# EAGLE board ZeroESPminimalTEST (EAGLE 6.5.0)
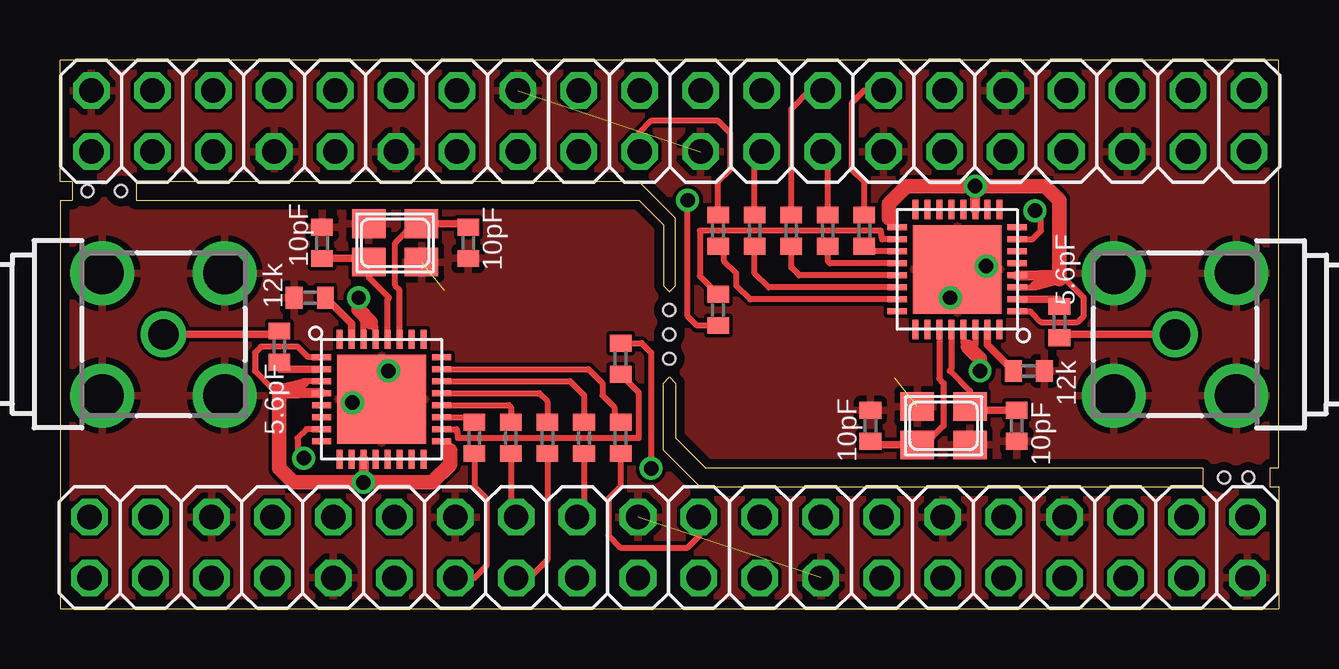
[diagram p0: board, top side]
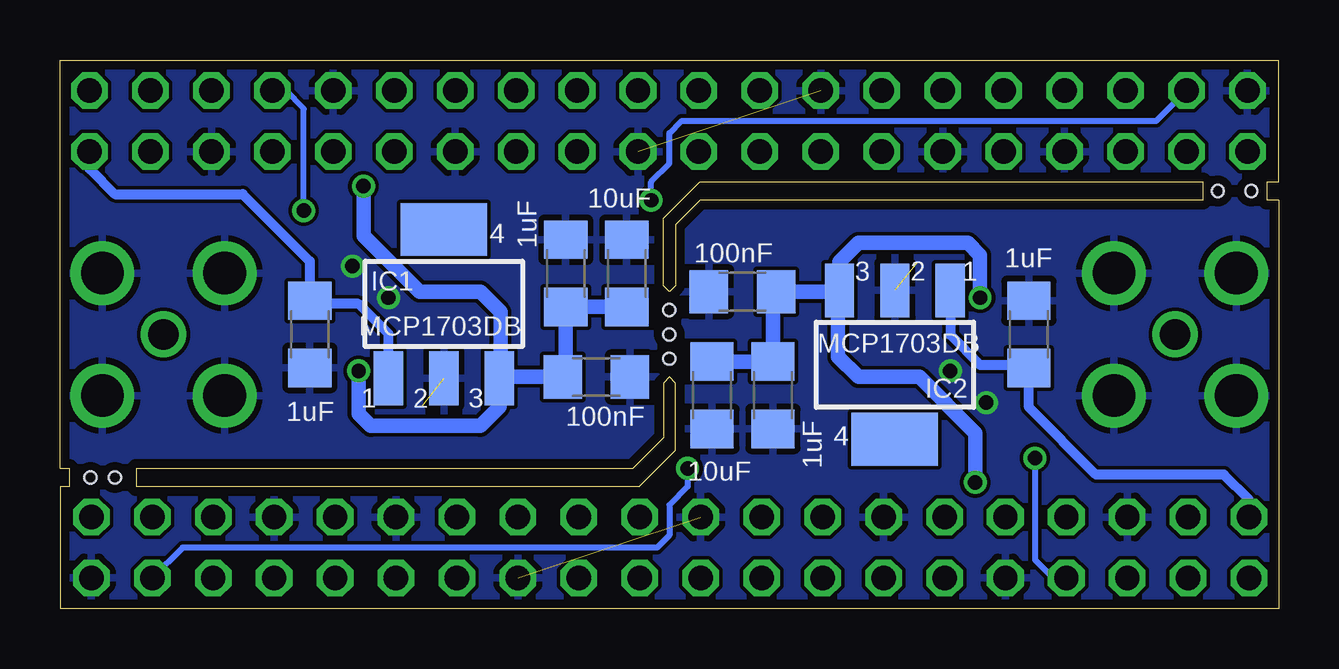
[diagram p1: board, bottom side, seen from below]

Size 50.8 x 22.86 mm. Coordinates in mm from the lower left corner, seen from the top.
Outline: 0,0 50.8,0 50.8,5.08 50.42,5.08 50.42,5.84 50.8,5.84 50.8,22.86 0,22.86 0,17.78 0.51,17.78 0.51,17.02 0,17.02 0,0
Outline: 3.17,17.02 24.13,17.02 25.15,16 25.15,13.46 25.4,13.21 25.65,13.46 25.65,16.26 24.13,17.78 3.17,17.78 3.17,17.02
Outline: 26.67,5.08 47.62,5.08 47.62,5.84 26.92,5.84 25.65,7.11 25.65,9.4 25.4,9.65 25.15,9.4 25.15,6.6 26.67,5.08
Copper layers (1*16): Top 0.0356mm / dielectric 1.5011mm / Bottom 0.0356mm
Design rules "LaenPCBOrder *": minimum track width 6mil, minimum drill 13mil, track to track 6mil, track to pad 6mil, pad to pad 6mil, via to via 6mil, smd to smd 6mil, copper to edge 15mil, drill to drill 6mil, minimum pad ring 7mil, minimum via ring 7mil, stop-mask expansion 3mil, vias tented up to drill 200mil, thermal gap 10mil
Holes 0.5 mm at 25.4,12.45 25.4,11.43 25.4,10.41 1.14,17.4 2.54,17.4 49.53,5.46 48.51,5.46

## Footprints (pad centres in the part's own frame; a part is rotated, then mirrored left to right if it is on the bottom)
C1206 = smd 1.6 x 1.8: 1 -1.4,0; 2 1.4,0
C0402 = smd 0.7 x 0.9: 1 -0.65,0; 2 0.65,0
SOT223 = smd 1.219 x 2.235: 1 -2.311,-3.099; 2 0,-3.099; 3 2.311,-3.099 | smd 3.6 x 2.2: 4 0,3.099
2X20 = drill 1.016 octagon: 1 -24.13,-1.27; 2 -24.13,1.27; 3 -21.59,-1.27; 4 -21.59,1.27; 5 -19.05,-1.27; 6 -19.05,1.27; 7 -16.51,-1.27; 8 -16.51,1.27; 9 -13.97,-1.27; 10 -13.97,1.27; 11 -11.43,-1.27; 12 -11.43,1.27; 13 -8.89,-1.27; 14 -8.89,1.27; 15 -6.35,-1.27; 16 -6.35,1.27; 17 -3.81,-1.27; 18 -3.81,1.27; 19 -1.27,-1.27; 20 -1.27,1.27; 21 1.27,-1.27; 22 1.27,1.27; 23 3.81,-1.27; 24 3.81,1.27; 25 6.35,-1.27; 26 6.35,1.27; 27 8.89,-1.27; 28 8.89,1.27; 29 11.43,-1.27; 30 11.43,1.27; 31 13.97,-1.27; 32 13.97,1.27; 33 16.51,-1.27; 34 16.51,1.27; 35 19.05,-1.27; 36 19.05,1.27; 37 21.59,-1.27; 38 21.59,1.27; 39 24.13,-1.27; 40 24.13,1.27
NX3225 = smd 1.4 x 1.2: 1 -1.1,-0.8; 2 1.1,-0.8; 3 1.1,0.8; 4 -1.1,0.8
R0402 = smd 0.7 x 0.9: 1 -0.65,0; 2 0.65,0
ESP8266EX = smd 0.8 x 0.25: CHIP_EN -2.5,-1.25; GPIO5 2.5,1.75; LNA -2.5,1.25; SDIO_CLK 2.5,0.25; SDIO_CMD 2.5,-0.25; SDIO_DATA_0 2.5,0.75; SDIO_DATA_1 2.5,1.25; SDIO_DATA_2 2.5,-1.25; SDIO_DATA_3 2.5,-0.75; TOUT -2.5,-0.75; VDD3P3_1 -2.5,0.75; VDD3P3_2 -2.5,0.25; VDD_RTC -2.5,-0.25; VDDA -2.5,1.75; VDDPST_2 2.5,-1.75; XPC_DCDC -2.5,-1.75 | smd 0.25 x 0.8: EXT_RSTB -1.75,2.5; GPIO0 1.25,-2.5; GPIO2 0.75,-2.5; GPIO4 1.75,-2.5; MTCK -0.25,-2.5; MTDI -1.25,-2.5; MTDO 0.25,-2.5; MTMS -1.75,-2.5; RES12K -1.25,2.5; U0RXD 1.75,2.5; U0TXD 1.25,2.5; VDDA_2 -0.75,2.5; VDDD -0.25,2.5; VDDPST -0.75,-2.5; XTAL_IN 0.25,2.5; XTAL_OUT 0.75,2.5 | smd 3.7 x 3.7: GND 0,0
BU-SMA-G = drill 1.27: 1 0,0 | drill 1.778: 2 -2.55,2.55; 3 2.55,2.55; 4 2.55,-2.55; 5 -2.55,-2.55

## Placement (x,y rotation side)
C1  1uF  [C1206]  10.41,11.43 90 bottom
C2  1uF  [C1206]  21.08,8.89 270 bottom
C3  10uF  [C1206]  23.62,8.89 270 bottom
C4  100nF  [C1206]  22.35,13.21 180 bottom
C5  5.6pF  [C0402]  9.14,10.92 270 top
C6  10pF  [C0402]  17.02,15.24 90 top
C7  10pF  [C0402]  10.92,15.24 270 top
C8  1uF  [C1206]  40.39,11.43 270 bottom
C9  1uF  [C1206]  29.72,13.97 90 bottom
C10  10uF  [C1206]  27.18,13.97 90 bottom
C11  100nF  [C1206]  28.45,9.65 0 bottom
C12  5.6pF  [C0402]  41.66,11.94 90 top
C13  10pF  [C0402]  33.78,7.62 270 top
C14  10pF  [C0402]  39.88,7.62 90 top
IC1  MCP1703DB  [SOT223]  34.8,12.7 0 bottom
IC2  MCP1703DB  [SOT223]  16,10.16 180 bottom
JP1  [2X20]  25.36,2.55 0 top
JP2  [2X20]  25.44,20.31 180 top
Q1  [NX3225]  13.97,15.24 180 top
Q2  [NX3225]  36.83,7.62 0 top
R1  [R0402]  23.37,10.41 90 top
R2  [R0402]  17.27,7.11 270 top
R3  [R0402]  18.8,7.11 270 top
R4  [R0402]  20.32,7.11 270 top
R5  [R0402]  21.84,7.11 270 top
R6  [R0402]  23.37,7.11 270 top
R7  12k  [R0402]  10.41,12.95 0 top
R8  [R0402]  30.48,15.75 90 top
R9  [R0402]  27.43,12.45 270 top
R10  [R0402]  33.53,15.75 90 top
R11  [R0402]  32,15.75 90 top
R12  [R0402]  28.96,15.75 90 top
R13  [R0402]  27.43,15.75 90 top
R14  12k  [R0402]  40.39,9.91 180 top
U$1  ESP8266EX  [ESP8266EX]  37.4,14.13 180 top
U$3  ESP8266EX  [ESP8266EX]  13.4,8.73 0 top
X1  BU-SMA-G  [BU-SMA-G]  4.32,11.43 180 top
X2  BU-SMA-G  [BU-SMA-G]  46.48,11.43 0 top

## Library data of the parts
C1-C4 C8-C11 R1-R6 R8-R13 = rcl
C5-C7 C12-C14 R7 R14 = resistor
IC1 IC2 = linear
JP1 JP2 Q1 Q2 = adafruit
U$1 U$3 = ESP8266EX
X1 X2 = con-coax; OC_FARNELL: unknown; OC_NEWARK: unknown

## Nets
$N1: R11.1 U$1.SDIO_CMD
$N2: R12.1 U$1.SDIO_DATA_0
$N3: R13.1 U$1.SDIO_DATA_1
$N22: R3.1 U$3.SDIO_CMD
$N23: R5.1 U$3.SDIO_DATA_0
$N24: R6.1 U$3.SDIO_DATA_1
CE0_RST: JP1.24
CE0_RST1: JP2.24
CHEN: JP1.7 U$3.CHIP_EN
CHEN1: JP2.7 U$1.CHIP_EN
GND: C1.2 C2.2 C3.2 C4.2 C6.1 C7.1 IC2.2 JP1.6 JP1.9 JP1.14 JP1.20 JP1.25 JP1.30 JP1.34 JP1.39 Q1.2 Q1.4 R7.1 U$3.GND X1.2 X1.3 X1.4 X1.5
GND1: C8.2 C9.2 C10.2 C11.2 C13.1 C14.1 IC1.2 JP2.6 JP2.9 JP2.14 JP2.20 JP2.25 JP2.30 JP2.34 JP2.39 Q2.2 Q2.4 R14.1 U$1.GND X2.2 X2.3 X2.4 X2.5
LNA: C5.2 U$3.LNA
LNA1: C12.2 U$1.LNA
MISO: JP1.21
MISO1: JP2.21
MOSI: JP1.19
MOSI1: JP2.19
N$1: R1.1 U$3.SDIO_DATA_2
N$2: R2.1 U$3.SDIO_DATA_3
N$3: C5.1 X1.1
N$4: R4.1 U$3.SDIO_CLK
N$5: R7.2 U$3.RES12K
N$6: R8.1 U$1.SDIO_CLK
N$7: C6.2 Q1.1 U$3.XTAL_OUT
N$8: R9.1 U$1.SDIO_DATA_2
N$9: C7.2 Q1.3 U$3.XTAL_IN
N$10: R10.1 U$1.SDIO_DATA_3
N$11: C12.1 X2.1
N$12: R14.2 U$1.RES12K
N$13: C13.2 Q2.1 U$1.XTAL_OUT
N$14: C14.2 Q2.3 U$1.XTAL_IN
RRX_ATX: JP1.10
RRX_ATX1: JP2.10
RTX_ARX: JP1.8
RTX_ARX1: JP2.8
SCLK: JP1.23
SCLK1: JP2.23
SD_CLK: JP1.15 R4.2
SD_CLK1: JP2.15 R8.2
SD_CMD: JP1.16 R3.2
SD_CMD1: JP2.16 R11.2
SD_D0: JP1.18 R5.2
SD_D1: JP1.22 R6.2
SD_D2: JP1.37 R1.2
SD_D3: JP1.13 R2.2
SD_D4: JP2.18 R12.2
SD_D5: JP2.22 R13.2
SD_D6: JP2.37 R9.2
SD_D7: JP2.13 R10.2
VCC1: C9.1 C10.1 C11.1 IC1.3 U$1.VDD3P3_1 U$1.VDD3P3_2 U$1.VDDA U$1.VDDA_2 U$1.VDDD U$1.VDDPST U$1.VDDPST_2
VCC2: C8.1 IC1.1 JP2.2
VCC3: C2.1 C3.1 C4.1 IC2.3 U$3.VDD3P3_1 U$3.VDD3P3_2 U$3.VDDA U$3.VDDA_2 U$3.VDDD U$3.VDDPST U$3.VDDPST_2
VCC5: C1.1 IC2.1 JP1.2

## Tracks (layer width: path | path; a pad name or v marks a point on that pad's centre or on a via)
$N1
  Top 0.254: U$1.SDIO_CMD 32.1,14.38 32,14.48 R11.1
$N2
  Top 0.254: U$1.SDIO_DATA_0 29.54,13.38 28.96,13.97 R12.1
$N3
  Top 0.254: U$1.SDIO_DATA_1 28.77,12.88 28.19,13.46 28.19,13.97 27.69,14.48 27.69,14.84 R13.1
$N22
  Top 0.254: U$3.SDIO_CMD 18.7,8.48 18.8,8.38 R3.1
$N23
  Top 0.254: U$3.SDIO_DATA_0 21.26,9.48 21.84,8.89 R5.1
$N24
  Top 0.254: U$3.SDIO_DATA_1 22.03,9.98 22.61,9.4 22.61,8.89 23.11,8.38 23.11,8.02 R6.1
CHEN  (via drill 0.6)
  Top 0.254: U$3.CHIP_EN 10.27,7.48 9.91,7.11 9.91,6.53 v10.16,6.27
  Bottom 0.254: v10.16,6.27 10.16,2.03 9.4,1.27 JP1.7
CHEN1  (via drill 0.6)
  Top 0.254: U$1.CHIP_EN 40.53,15.38 40.89,15.75 40.89,16.33 v40.64,16.59
  Bottom 0.254: v40.64,16.59 40.64,20.83 41.4,21.59 JP2.7
GND  (via drill 0.6)  (2 unrouted)
  other vias: 13.69,9.91 12.19,8.59
  pour Bottom: -1.08,19.22 52.62,19.27 52.11,-1.3 -1.34,-1.36
  pour Top: -0.34,17.95 -0.34,-1.36 52.65,-1.36 52.65,17.95
GND1  (via drill 0.6)  (2 unrouted)
  other vias: 37.11,12.95 38.61,14.27
  pour Bottom: 51.88,3.64 -1.82,3.59 -1.31,24.16 52.14,24.22
  pour Top: 51.14,4.91 51.14,23.71 -1.85,23.45 -1.85,4.91
LNA
  Top 0.305: U$3.LNA 9.18,9.98 C5.2
LNA1
  Top 0.305: U$1.LNA 41.62,12.88 C12.2
N$1
  Top 0.254: U$3.SDIO_DATA_2 16.52,7.48 16.59,7.11 24.13,7.11 24.13,9 R1.1
N$2
  Top 0.254: U$3.SDIO_DATA_3 17.06,7.98 R2.1
N$3
  Top 0.305: X1.1 9.03,11.43 C5.1
N$4
  Top 0.254: U$3.SDIO_CLK 19.98,8.98 20.32,8.64 R4.1
N$5
  Top 0.305: U$3.RES12K 12.15,11.87 R7.2
N$6
  Top 0.254: U$1.SDIO_CLK 30.82,13.88 30.48,14.22 R8.1
N$7
  Top 0.254: Q1.1 14.77,16.04 13.97,15.24 13.97,13.46 14.15,13.28 U$3.XTAL_OUT
  Top 0.305: Q1.1 16.87,16.04 C6.2
N$8
  Top 0.254: U$1.SDIO_DATA_2 34.27,15.38 34.21,15.75 26.67,15.75 26.67,13.86 R9.1
N$9
  Top 0.254: Q1.3 12.87,13.8 13.72,12.95 13.65,12.89 U$3.XTAL_IN
  Top 0.305: C7.2 12.72,14.59 Q1.3
N$10
  Top 0.254: U$1.SDIO_DATA_3 33.74,14.88 R10.1
N$11
  Top 0.305: X2.1 41.77,11.43 C12.1
N$12
  Top 0.305: U$1.RES12K 38.65,10.99 R14.2
N$13
  Top 0.254: Q2.1 36.03,6.82 36.83,7.62 36.83,9.4 36.65,9.58 U$1.XTAL_OUT
  Top 0.305: Q2.1 33.93,6.82 C13.2
N$14
  Top 0.254: Q2.3 37.93,9.06 37.08,9.91 37.15,9.97 U$1.XTAL_IN
  Top 0.305: C14.2 38.08,8.27 Q2.3
SD_CLK
  Top 0.254: R4.2 20.32,2.03 19.56,1.27 JP1.15
SD_CLK1
  Top 0.254: R8.2 30.48,20.83 31.24,21.59 JP2.15
SD_CMD
  Top 0.254: R3.2 18.8,4.03 JP1.16
SD_CMD1
  Top 0.254: R11.2 32,18.83 JP2.16
SD_D0
  Top 0.254: R5.2 21.84,4.11 JP1.18
SD_D1
  Top 0.254: R6.2 23.37,5.08 22.86,4.57 22.86,3.05 23.37,2.54 26.16,2.54 26.67,3.05 26.67,3.78 JP1.22
SD_D2  (via drill 0.6)
  Top 0.254: R1.2 24.24,11.06 24.64,10.67 v24.64,5.84
  Bottom 0.254: v24.64,5.84 24.64,5.08 25.4,4.32 25.4,3.05 25.91,2.54 45.69,2.54 JP1.37
SD_D3
  Top 0.254: R2.2 17.27,5.08 17.78,4.57 17.78,1.78 17.27,1.27 JP1.13
SD_D4
  Top 0.254: R12.2 28.96,18.75 JP2.18
SD_D5
  Top 0.254: R13.2 27.43,17.78 27.94,18.29 27.94,19.81 27.43,20.32 24.64,20.32 24.13,19.81 24.13,19.08 JP2.22
SD_D6  (via drill 0.6)
  Top 0.254: R9.2 26.56,11.8 26.16,12.19 v26.16,17.02
  Bottom 0.254: v26.16,17.02 26.16,17.78 25.4,18.54 25.4,19.81 24.89,20.32 5.11,20.32 JP2.37
SD_D7
  Top 0.254: R10.2 33.53,17.78 33.02,18.29 33.02,21.08 33.53,21.59 JP2.13
VCC1  (via drill 0.6)
  Top 0.254: U$1.VDDA_2 38.15,10.97 37.85,10.92 37.65,11.12 U$1.VDDD | U$1.VDD3P3_1 40.56,13.38 40.64,13.46 | 41.57,13.88 41.66,13.72 41.91,13.72 42.67,12.95 42.67,12.19 42.42,11.94 40.89,11.94 40.45,12.38 U$1.VDDA | U$1.VDDPST_2 34.9,15.9 34.54,16.26
  Top 0.406: 40.64,13.46 41.66,13.72 40.81,13.88 | v38.15,17.6 38.15,17.22 | U$1.VDDPST 38.15,17.22 | U$1.VDD3P3_2 40.81,13.88 | 41.57,13.88 40.81,13.88 | 38.2,17.6 38.15,17.22
  Top 0.61: 41.66,13.72 41.66,17.02 41.07,17.6 38.2,17.6 | v38.35,9.91 38.35,10.41 37.85,10.92 | 34.54,16.26 34.54,16.87 35.28,17.6 v38.15,17.6
  Bottom 0.406: 29.72,9.78 C11.1
  Bottom 0.61: C10.1 C9.1 29.72,9.78 | v38.35,9.91 38.35,8.13 37.85,7.62 33.27,7.62 32.49,8.41 IC1.3 32.44,9.65 | 32.44,9.65 32.44,12.37 33.27,13.21 35.81,13.21 38.15,15.54 v38.15,17.6 | C11.1 32.44,9.65
VCC2
  Bottom 0.406: IC1.1 37.11,11.46 38.35,12.7 39.75,12.7 C8.1 40.39,14.48 43.18,17.27 48.51,17.27 49.57,18.32 JP2.2
VCC3  (via drill 0.6)
  Top 0.254: U$3.VDDA_2 12.65,11.89 12.95,11.94 13.15,11.74 U$3.VDDD | U$3.VDD3P3_1 10.24,9.48 10.16,9.4 | 9.23,8.98 9.14,9.14 8.89,9.14 8.13,9.91 8.13,10.67 8.38,10.92 9.91,10.92 10.35,10.48 U$3.VDDA | U$3.VDDPST_2 15.9,6.96 16.26,6.6
  Top 0.406: 10.16,9.4 9.14,9.14 9.99,8.98 | v12.65,5.26 12.65,5.64 | U$3.VDDPST 12.65,5.64 | U$3.VDD3P3_2 9.99,8.98 | 9.23,8.98 9.99,8.98 | 12.6,5.26 12.65,5.64
  Top 0.61: 9.14,9.14 9.14,5.84 9.73,5.26 12.6,5.26 | v12.45,12.95 12.45,12.45 12.95,11.94 | 16.26,6.6 16.26,5.99 15.52,5.26 v12.65,5.26
  Bottom 0.406: 21.08,13.08 C4.1
  Bottom 0.61: C3.1 C2.1 21.08,13.08 | v12.45,12.95 12.45,14.73 12.95,15.24 17.53,15.24 18.31,14.45 IC2.3 18.36,13.21 | 18.36,13.21 18.36,10.49 17.53,9.65 14.99,9.65 12.65,7.32 v12.65,5.26 | C4.1 18.36,13.21
VCC5
  Bottom 0.406: IC2.1 13.69,11.4 12.45,10.16 11.05,10.16 C1.1 10.41,8.38 7.62,5.59 2.29,5.59 1.23,4.54 JP1.2